# Altium PCB POWERSO-20_L15.9-W11.0-P1.27-LS14.2-BL-EP.pcbdoc
Units mm, origin at the board's own origin, x right, y up, seen from the top; angles counter-clockwise.
Board outline 29.06 x 28.42 mm, 2 copper layers (Top Layer, Bottom Layer); 1 components, 0 nets, 20 pads, 0 vias.
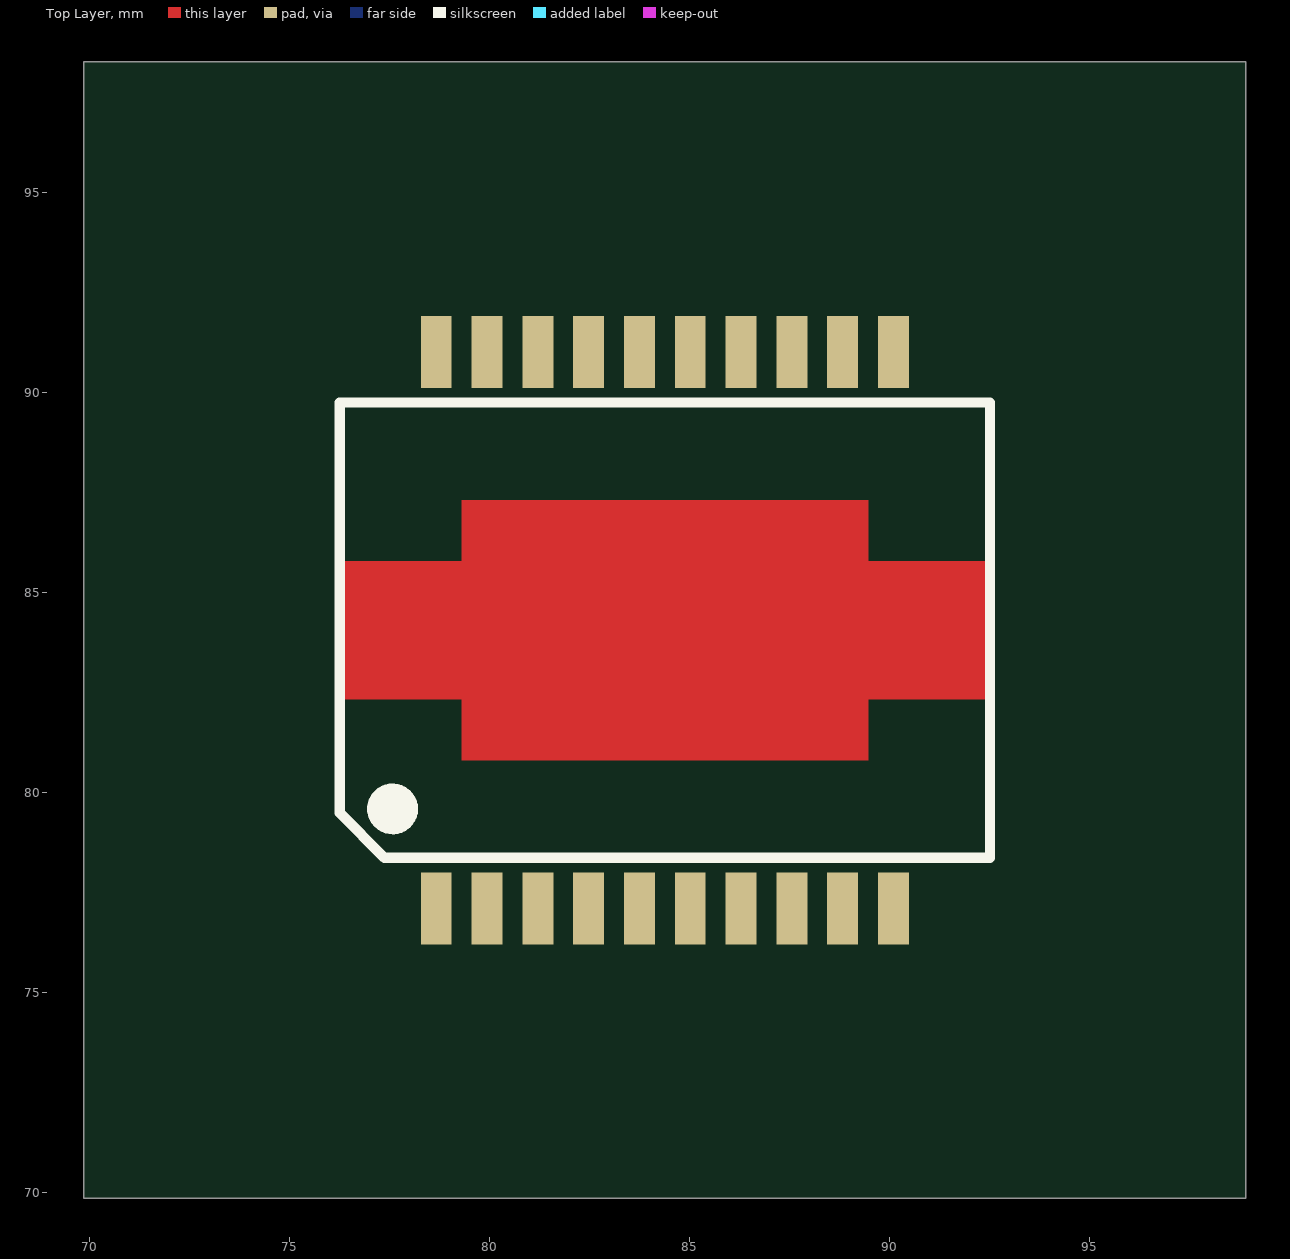
[diagram p0: Top Layer view]
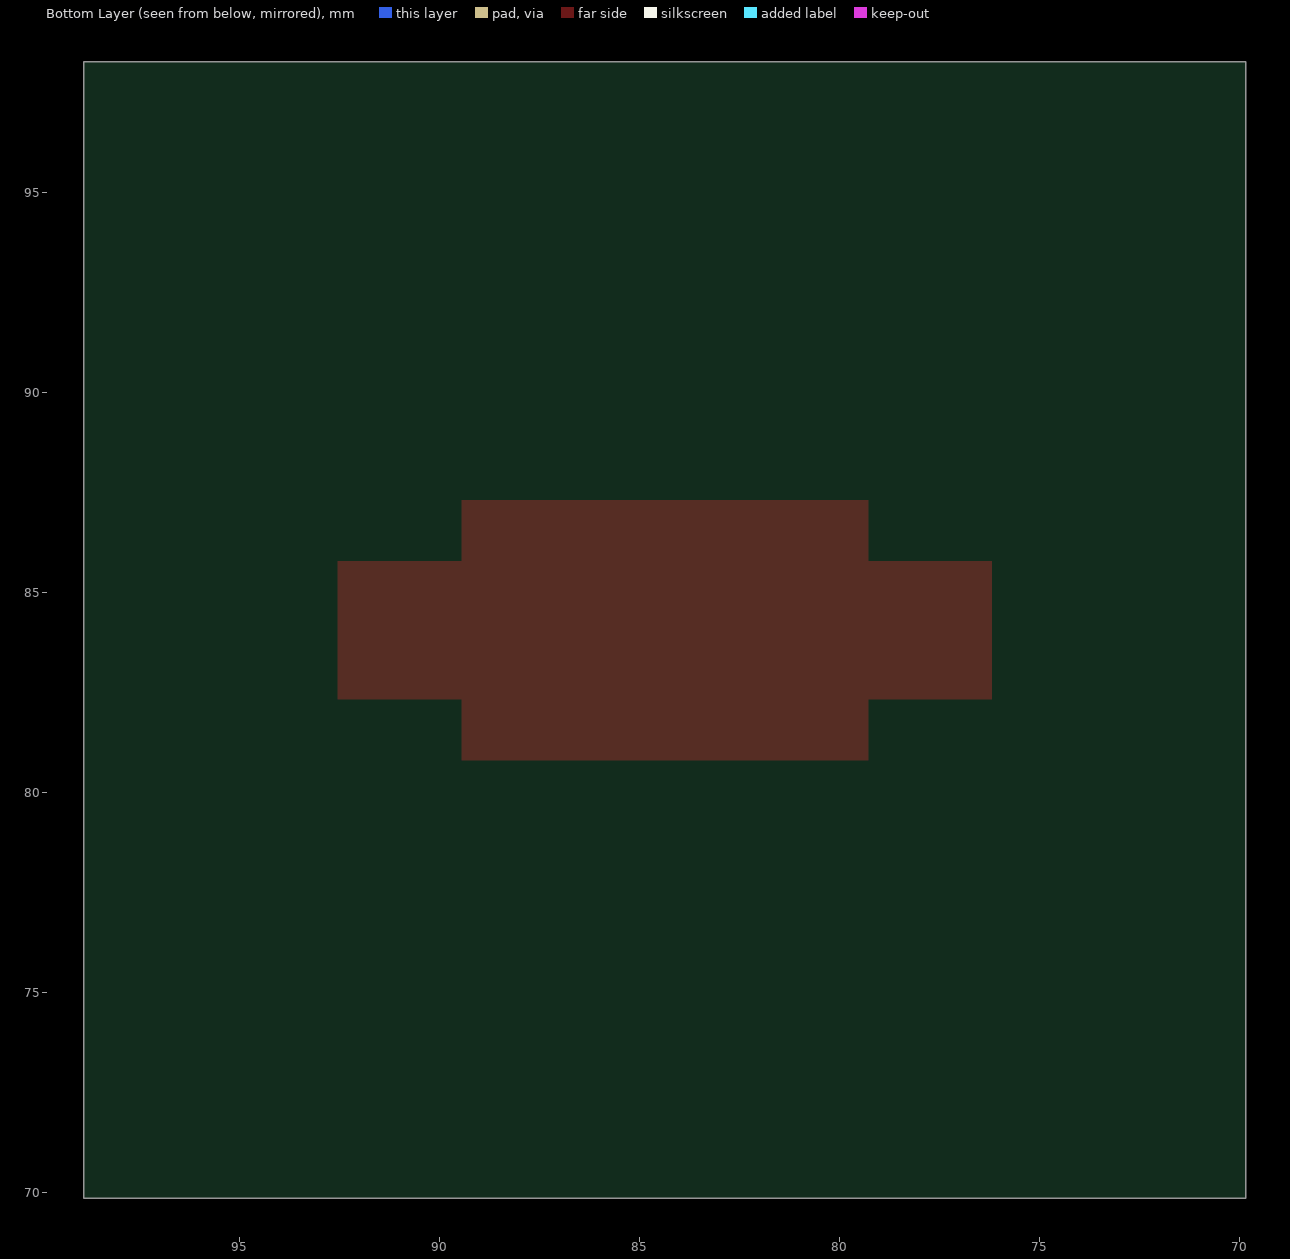
[diagram p1: Bottom Layer view, seen from below]

## Layer stack, top to bottom
Top Layer: signal copper (thickness not stored)
Dielectric: dielectric 0.32, FR-4, Dk 4.8
Bottom Layer: signal copper (thickness not stored)

## Board outline
98.906,69.85 69.85,69.85 69.85,98.265 98.906,98.265

## Components (designator, comment, footprint, x,y, rotation, side; value= is the part's Value field where it differs from the comment)
? "POWERSO-20_L15.9-W11.0-P1.27-LS14.2-BL-EP" POWERSO-20_L15.9-W11.0-P1.27-LS14.2-BL-EP 84.378,84.058 r0 top

## Footprints (in the part's own frame and the unit in brackets; to place one, negate y for a bottom-side part, rotate by r counter-clockwise, add the part's x,y. Pads: shape width x height; smd on the part's side, far side on the other; paste and mask are expansions set on the pad)
POWERSO-20_L15.9-W11.0-P1.27-LS14.2-BL-EP [mm]
  rect 0.772x1.8 smd paste+0 mask+0.051: 1(-5.715,-6.955) 2(-4.445,-6.958) 3(-3.175,-6.958) 4(-1.905,-6.958) 5(-0.635,-6.958) 6(0.635,-6.958) 7(1.905,-6.958) 8(3.175,-6.958) 9(4.445,-6.958) 10(5.715,-6.955) 11(5.715,6.955) 12(4.445,6.958) 13(3.175,6.958) 14(1.905,6.958) 15(0.635,6.958) 16(-0.635,6.958) 17(-1.905,6.958) 18(-3.175,6.958) 19(-4.445,6.958) 20(-5.715,6.955)
  Top Layer region: 5.082,-1.727 5.082,-3.249 -5.082,-3.249 -5.082,-3.141 -5.08,-3.141 -5.08,-1.727 -8.178,-1.727 -8.178,1.725 -5.08,1.725 -5.08,3.249 5.079,3.249 5.079,1.725 8.178,1.725 8.178,-1.727
  silkscreen extent -8.13,-5.69 8.13,5.69

## Nets (pads, with @x,y where several pads share a name; then routed paths per layer and width w, separated by ;. In a path a pad name is that pad's centre, name@x,y a point inside that pad or via, vN(x,y) a via of type N, cw(c..) or ccw(c..) an arc to the next point about the centre after c; other vN are vias at no path point)
pads on no net: ?.1 ?.2 ?.3 ?.4 ?.5 ?.6 ?.7 ?.8 ?.9 ?.10 ?.11 ?.12 ?.13 ?.14 ?.15 ?.16 ?.17 ?.18 ?.19 ?.20